# Altium PCB 遥控2.PcbDoc
Units mil, origin at the board's own origin, x right, y up, seen from the top; angles counter-clockwise.
Board outline 1574.8 x 787.4 mil, 2 copper layers (Top Layer, Bottom Layer); 29 components, 15 nets, 79 pads, 5 vias.
Unrouted connection lines stored in the file: 22.
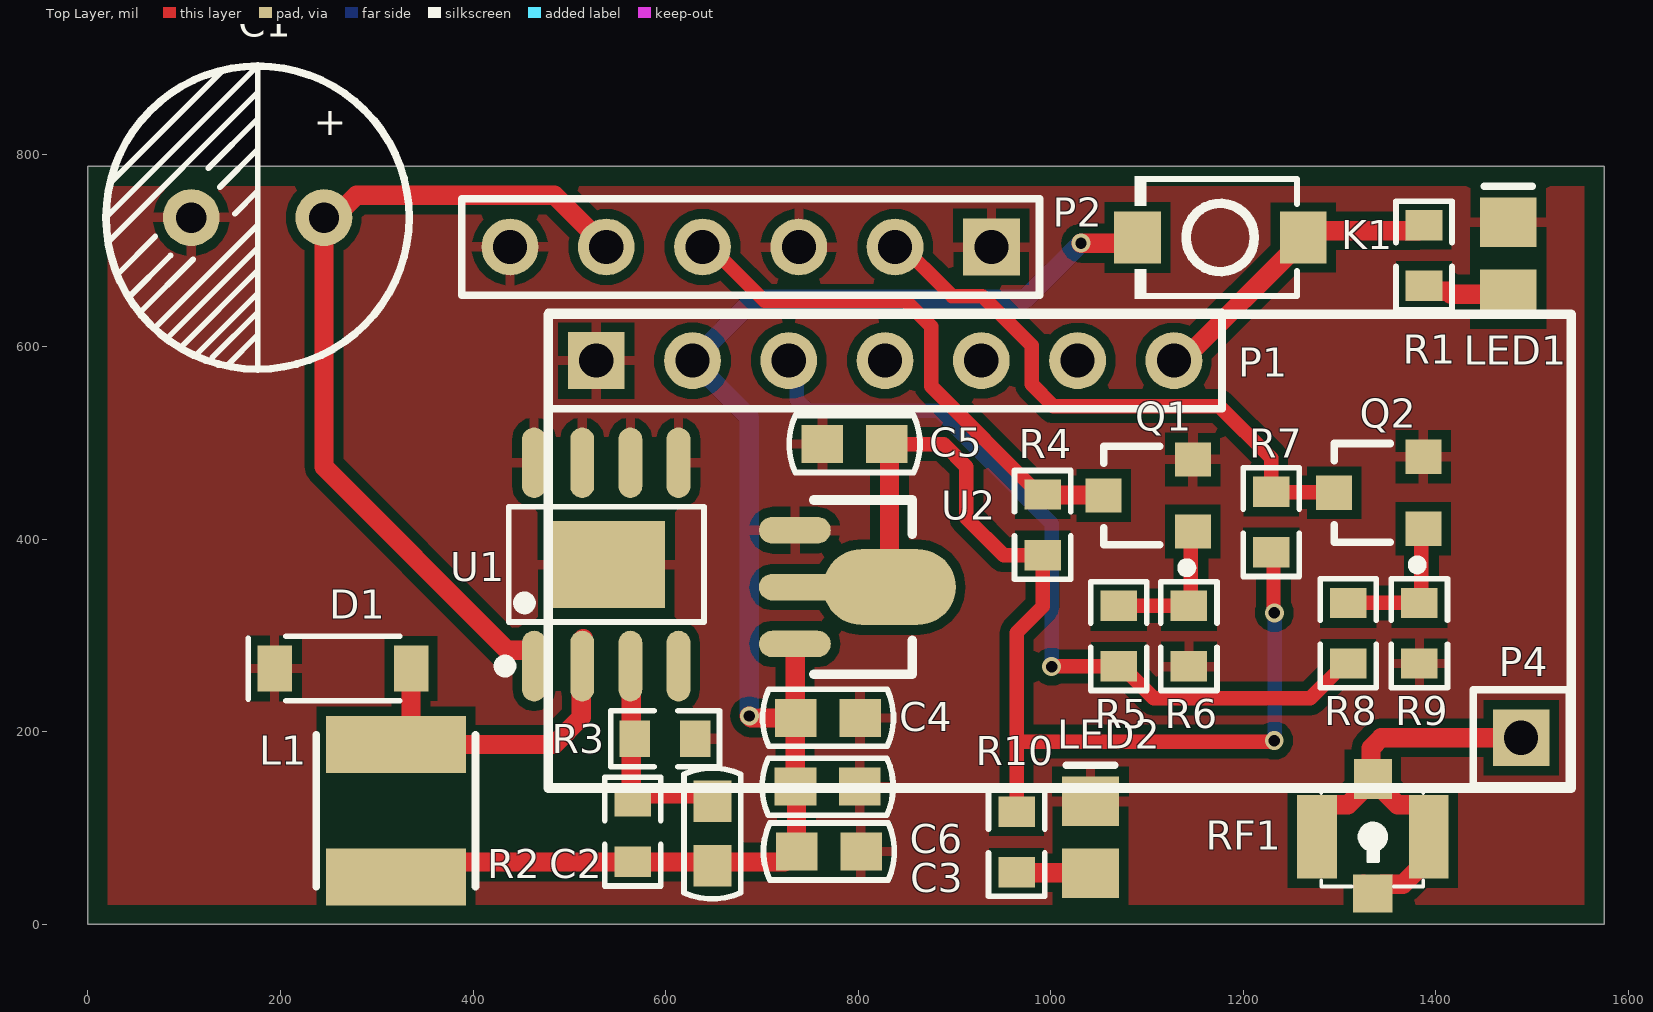
[diagram p0: Top Layer view]
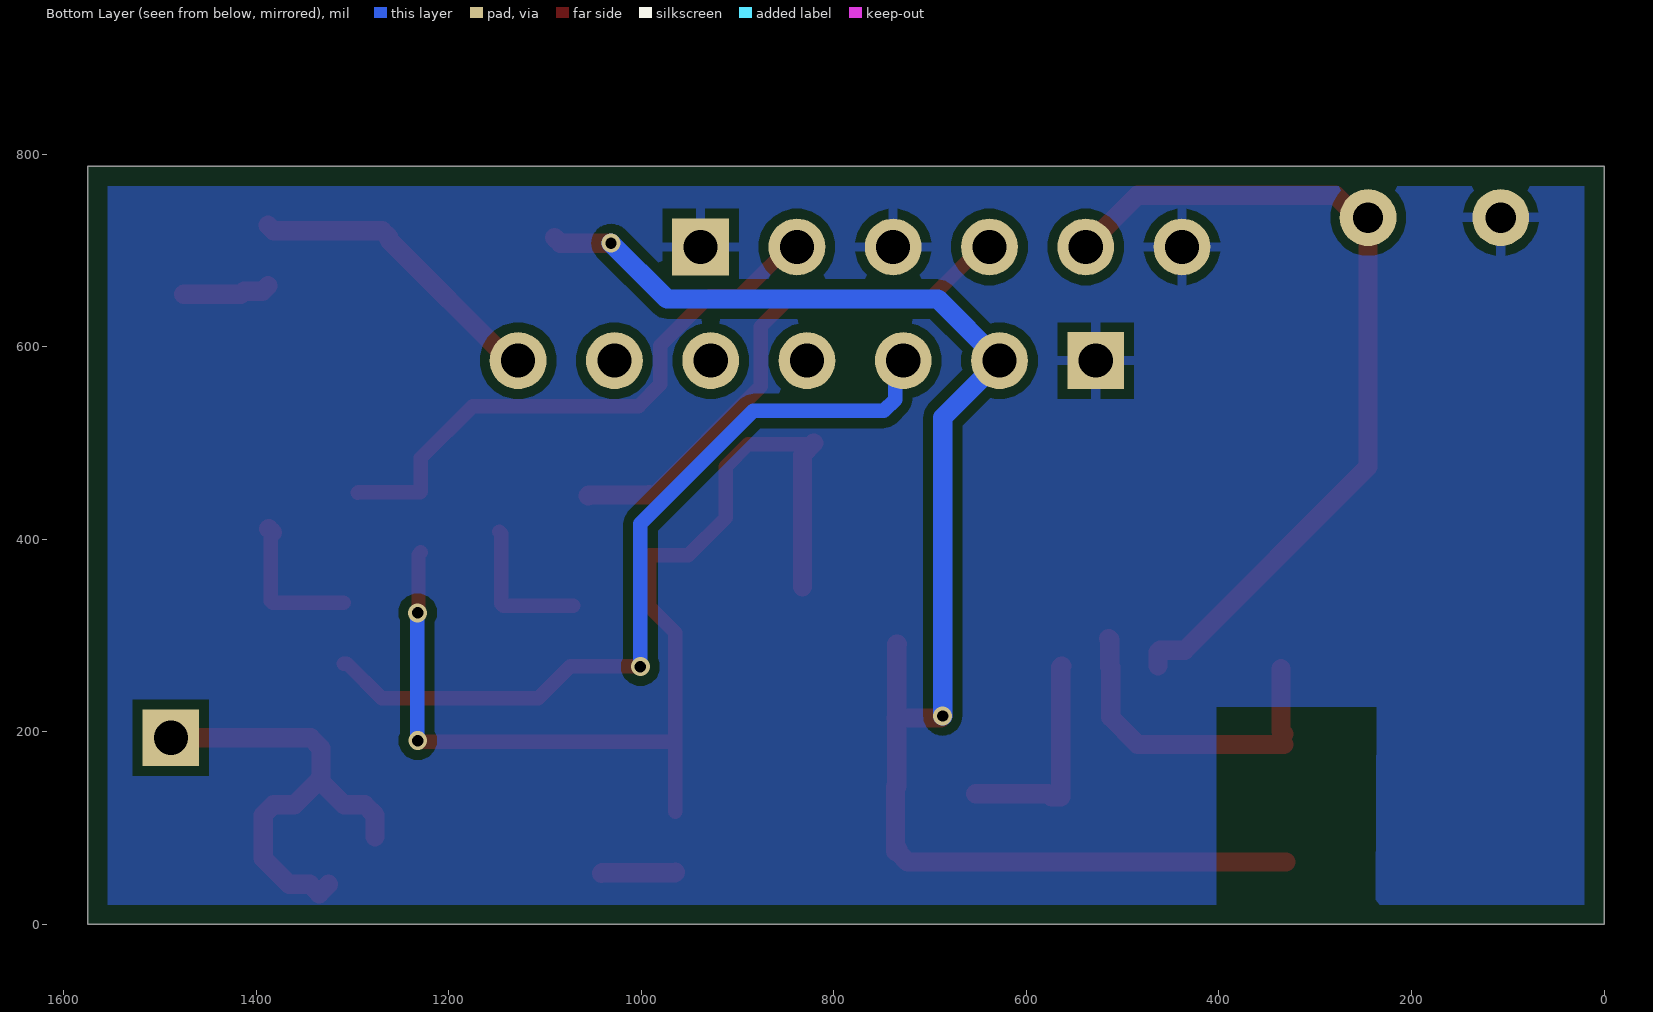
[diagram p1: Bottom Layer view, seen from below]
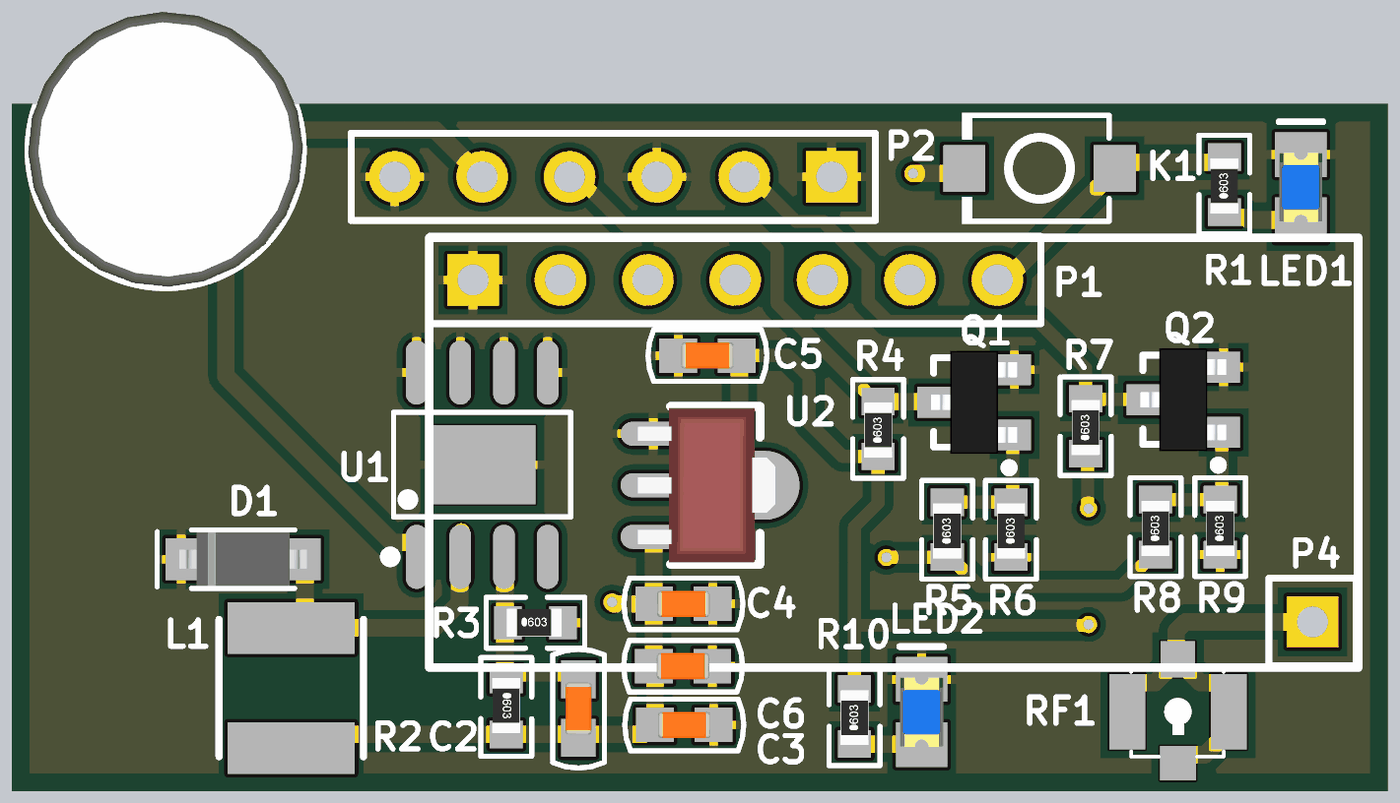
[diagram p2: 3D render of the assembled board from above, using the file's embedded part models]

## Layer stack, top to bottom
Top Solder: solder mask 0.4, Solder Resist, Dk 3.5
Top Layer: signal copper 1.4
Dielectric 1: dielectric 12.6, FR-4, Dk 4.8
Bottom Layer: signal copper 1.4
Bottom Solder: solder mask 0.4, Solder Resist, Dk 3.5

## Board outline
0,0 0,787.4 1574.8,787.4 1574.8,0

## Design rules (kind name [scope] priority, off if disabled: settings)
BoardOutlineClearance [All] p1: gap=20 ignorepadtopadclearanceinfootprint=FALSE
Clearance [All] p1: gap=10 ignorepadtopadclearanceinfootprint=FALSE except(0: Arc-Hole Track-Hole SMDPad-Hole THPad-Hole Via-Hole Fill-Hole Poly-Hole Region-Hole Text-Hole)
PolygonConnect [All] p1: connectstyle=Relief reliefconductorwidth=10 reliefentries=4 polygonreliefangle="90 Angle" airgapwidth=10
RoutingVias [All] p1: holewidth=11.81 width=19.68 viastyle="Through Hole" minholewidth=11.81 minwidth=19.68 maxholewidth=11.81 maxwidth=19.68
SolderMaskExpansion [All] p1: expansion=4 istentingtop=FALSE
Width [All] p1: maxlimit=30 minlimit=10 preferedwidth=20
30 further rules are at their usual default settings.

## Components (designator, comment, footprint, x,y, rotation, side; value= is the part's Value field where it differs from the comment)
C1 "33uF/100V" 25V330UF-ZC 176.18,734.25 r180 top
C2 "33nF" CAP-0603 648.62,94.49 r270 top
C3 "1uF" CAP-0603 769.69,75.79 r180 top
C4 "10uF" CAP-0603 768.7,214.57 r180 top
C5 "10uF" CAP-0603 796.26,499.02 r0 top
C6 "100nF" CAP-0603 768.32,143.08 r180 top
D1 "S210" SOD-123 264.76,265.75 r180 top
K1 "SW-PB" SW-SMD_L3.9-W3.0-P4.45 1176.18,713.58 r180 top
L1 "47uH" IND-SMD_L4.0-W4.0_FNR4012S 319.88,118.11 r90 top
LED1 "LED" LED_0805 1475.39,691.93 r90 top
LED2 "LED" LED_0805 1041.34,90.55 r90 top
P1 "Header 7" HDR1X7 527.95,585.63 r0 top
P2 "Header 6" HDR1X6 938.39,703.74 r180 top
P4 "Plug" HEADER_1 1488.78,193.9 r180 top
Q1 "SS8050" SOT-23 1101.39,445.44 r90 top
Q2 "SS8050" SOT-23 1340.8,448.39 r90 top
R1 "1K" "0603 - duplicate1" 1387.8,694.88 r90 top
R2 "10K" "0603 - duplicate1" 565.94,96.46 r270 top
R3 "3.3K" "0603 - duplicate1" 599.41,192.91 r0 top
R4 "4.7K" "0603 - duplicate1" 991.65,415.04 r90 top value=10K
R5 "1K" "0603 - duplicate1" 1070.65,299.54 r90 top value=10K
R6 "10K" "0603 - duplicate1" 1143.65,299.54 r90 top
R7 "4.7K" "0603 - duplicate1" 1229.06,417.99 r90 top value=10K
R8 "1K" "0603 - duplicate1" 1309.06,302.49 r90 top value=10K
R9 "10K" "0603 - duplicate1" 1383.06,302.49 r90 top
R10 "1K" "0603 - duplicate1" 964.57,85.63 r90 top
RF1 "6GHz" CONN-SMD_GT-RF1125A-01G 1334.65,91.54 r0 top
U1 "XL7005A" SOIC-8_L4.9-W3.9-P1.27-LS6.0-BL-EP3.1-1 538.39,374.02 r0 top
U2 "AMS1117-3.3" SOT89 783.46,350.39 r180 top

## Footprints (in the part's own frame and the unit in brackets; to place one, negate y for a bottom-side part, rotate by r counter-clockwise, add the part's x,y. Pads: shape width x height; smd on the part's side, far side on the other; paste and mask are expansions set on the pad)
25V330UF-ZC [mm] "25V330UF-直插电解电容  D=8mm,内径5mm"
  round 1.5 hole 0.8: 1(-1.75,0) 2(1.75,0)
  silkscreen extent -4,-4 4,4, body extent -4,-4.03 4,3.97, height 11.6
"0603 - duplicate1" [mm] "贴片带丝印"
  rect 0.8x0.965 smd: 1(-0.8,0) 2(0.8,0)
  silkscreen extent -1.43,-0.74 1.44,0.74, body extent -0.84,-0.41 0.76,0.41, height 0.45
CAP-0603 [mm] "贴片电容"
  rect 1.1x1 smd: 1(-0.85,0) 2(0.85,0)
  silkscreen extent -1.73,-0.75 1.73,0.75, body extent -0.76,-0.38 0.76,0.38, height 0.78
CONN-SMD_GT-RF1125A-01G [mm]
  rect 1.05x2.2 smd paste+0 mask+0.05: 1(-1.475,-0.012) 3(1.475,-0.012)
  rect 1x1.05 smd paste+0 mask+0.05: 2(0,1.513)
  rect 1.05x1 smd paste+0 mask+0.05: 4(0,-1.513)
  silkscreen extent -1.36,-1.32 1.33,1.35
HDR1X6 [mm] "Connector; Header; 6 Position"
  rect 1.5x1.5 hole 0.9: 1(0,0)
  round 1.5 hole 0.9: 2(2.54,0) 3(5.08,0) 4(7.62,0) 5(10.16,0) 6(12.7,0)
  silkscreen extent -1.27,-1.27 13.97,1.27
HDR1X7 [mm] "Connector; Header; 7 Position"
  rect 1.5x1.5 hole 0.9: 1(0,0)
  round 1.5 hole 0.9: 2(2.54,0) 3(5.08,0) 4(7.62,0) 5(10.16,0) 6(12.7,0) 7(15.24,0)
  silkscreen extent -1.27,-1.27 16.51,1.27
HEADER_1 [mm] "2.54排针-3x1"
  rect 1.5x1.5 hole 0.9: 1(0,0)
  silkscreen extent -1.27,-1.27 1.27,1.27
IND-SMD_L4.0-W4.0_FNR4012S [mm]
  rect 1.5x3.7 smd: 1(-1.75,0) 2(1.75,0)
  silkscreen extent -2,-2.1 2,2.1
LED_0805 [mm] "贴片二极管"
  rect 1.3x1.5 smd: 1(-0.95,0) 2(0.95,0)
  silkscreen extent 1.91,-0.63 1.91,0.64, body extent -1.01,-0.62 1.01,0.62, height 1.1
SOD-123 [mm]
  rect 0.91x1.22 smd: 1(-1.8,0) 2(1.8,0)
  silkscreen extent -1.5,-0.85 2.5,0.85, body extent -1.85,-0.77 1.85,0.78, height 1.18
SOIC-8_L4.9-W3.9-P1.27-LS6.0-BL-EP3.1-1 [mm]
  oval 0.63x1.865 smd: 1(-1.905,-2.683) 2(-0.635,-2.683) 3(0.635,-2.683) 4(1.905,-2.683) 5(1.905,2.682) 6(0.635,2.682) 7(-0.635,2.682) 8(-1.905,2.682)
  rect 3.1x2.3 smd paste+0 mask+0.05: 9(0,0)
  silkscreen extent -2.82,-2.83 2.58,1.52
SOT89 [mm] "SOT89封装"
  oval 1.9x0.7 smd: 1(1.25,-1.5) 3(1.25,1.5)
  oval 3.5x2 smd: 2(-1.25,0)
  oval 2.1x0.7 smd: 2(1.151,0)
  silkscreen extent -1.85,-2.3 0.75,2.3, body extent -2.3,-2.25 1.7,2.25, height 1.5
SOT-23 [mm]
  rect 0.9x0.95 smd: 1(-0.95,-1.175) 2(0.95,-1.175) 3(0,1.175)
  silkscreen extent -2.03,-1.14 1.3,1.18, body extent -1.5,-1.25 1.5,1.25, height 1.15
SW-SMD_L3.9-W3.0-P4.45 [mm]
  rect 1.23x1.36 smd: 1(-2.185,0) 2(2.185,0)
  silkscreen extent -2.03,-1.62 2.25,1.62

## Part data
C1: library part 470uF, Manufacturer=ValuePro, Manufacturer Part="470uF 35V 10*15Green high frequency", nameAlias=Capacitance, spicePre=C, spiceSymbolName="470uF 35V 10*15Green high frequency", Supplier=LCSC, Supplier Part=C45081
C2 C3 C4 C5 C6: library part Cap, "无极性电容", LatestRevisionDate=17-Jul-2002, LatestRevisionNote="Re-released for DXP Platform.", PackageReference=RAD-0.3, Published=8-Jun-2000, Publisher="Altium Limited"
D1: library part B340A, LCSC Assembly=Yes, Manufacturer=MDD, image=//image.lceda.cn/szlcsc/C64982.jpg, Manufacturer Part=B340A, SMT Type=Extend, spicePre=D, spiceSymbolName=B340A, Supplier=LCSC, Supplier Part=C64982
K1: "微动开关", LatestRevisionDate=17-Jul-2002, LatestRevisionNote="Re-released for DXP Platform.", PackageReference=SPST-2, Published=24-Mar-1999, Publisher="Altium Limited", Suppliter Part=C961737
L1: library part 68uH, Manufacturer=SXN, Manufacturer Part=SMDRI127-680MT, nameAlias=Inductance, spicePre=L, spiceSymbolName=SMDRI127-680MT, Supplier=LCSC, Supplier Part=C9907
LED1 LED2: "发光二极管", LatestRevisionDate=08-Jul-2005, LatestRevisionNote="Mech Layer 1 removed.", PackageReference=LED-0, Published=8-Jun-2000, Publisher="Altium Limited"
P1: "Header, 7-Pin", LatestRevisionDate=17-Jul-2002, LatestRevisionNote="Re-released for DXP Platform.", Publisher="Altium Limited"
P2: "Header, 6-Pin", LatestRevisionDate=17-Jul-2002, LatestRevisionNote="Re-released for DXP Platform.", Publisher="Altium Limited"
P4: "安装孔", LatestRevisionDate=17-Jul-2002, LatestRevisionNote="Re-released for DXP Platform.", Publisher="Altium Limited"
Q1 Q2: "NPN贴片三极管", PackageDocument=Sep-1998, Code_JEDEC=TO-92A, ComponentLink1Description="Manufacturer Link", ComponentLink1URL=http://www.fairchildsemi.com/, ComponentLink2Description=Datasheet, ComponentLink2URL=http://www.fairchildsemi.com/ds/2N%2F2N3904.pdf, DatasheetDocument=1997, LatestRevisionDate=15-Jan-2003, LatestRevisionNote="PCB Footprint 'BCY-W3/D4.7' replaced", PackageReference=TO-92A, Published=8-Jun-2000, Publisher="Altium Limited"
R1 R4 R5 R6 R7 R8 R9 R10: library part Res, "贴片电阻", LatestRevisionDate=17-Jul-2002, LatestRevisionNote="Re-released for DXP Platform.", PackageReference=AXIAL-0.4, Published=8-Jun-2000, Publisher="Altium Limited"
R2: library part 1K, LCSC Assembly=Yes, Manufacturer=UniOhm, Manufacturer Part=0603WAF1001T5E, nameAlias="Resistance (Ohms)", SMT Type=Basic, spicePre=R, spiceSymbolName=0603WAF1001T5E, Supplier=LCSC, Supplier Part=C21190
R3: library part 3K, LCSC Assembly=Yes, Manufacturer=UniOhm, Manufacturer Part=0603WAF3001T5E, nameAlias="Resistance (Ohms)", SMT Type=Basic, spicePre=R, spiceSymbolName=0603WAF3001T5E, Supplier=LCSC, Supplier Part=C4211
RF1: library part GT-RF1125A-01G, JLCPCB Part Class="Extended Part", LCSC Part Name="内针 IPEX 立贴", Manufacturer=G-Switch(品赞), Operating Temperature Range=-40℃~+90℃, Add into BOM=yes, Connector Type=板端, Convert to PCB=yes, Datasheet=https://atta.szlcsc.com/upload/public/pdf/source/20240806/E29158DC2BBCFBE0FBB4FF318E1913A6.pdf, Device=GT-RF1125A-01G, Impedance=20mΩ, Interface=内针, Interface Diameter=2mm, Interface Length/Height=1.25mm, Manufacturer Part=GT-RF1125A-01G, Number of Ports=1, RF Series=IPEX, Style=立贴, Supplier=LCSC, Supplier Footprint=SMD, Supplier Part=C5299419, Symbol=GT-RF1125A-01G
U1: Frequency - Switching=150kHz, JLCPCB Part Class="Extended Part", LCSC Part Name="0.4A 150kHz 80V 降压型DC-DC转换器", Manufacturer=XLSEMI(芯龙), Operating Temperature=-40℃~+125℃@(TJ), Output Current=400mA, Output Voltage=1.25V~20V, Quiescent Current=2.5mA, Voltage - Supply=5V~80V, Add into BOM=yes, Convert to PCB=yes, Datasheet=https://atta.szlcsc.com/upload/public/pdf/source/20150821/1457707346919.pdf, Device=XL7005A, Function=降压型, Manufacturer Part=XL7005A, Number of Outputs=1, Output Type=可调, Supplier=LCSC, Supplier Footprint=SOIC-8-EP, Supplier Part=C50848, Switch tube (built-in/external)=内置, Symbol=XL7005A, Synchronous Rectifier=否, Topology=降压式
U2: library part AMS1117, "3.3V稳压芯片"

## Via types
v1: diameter 19.68, hole 11.81, Top Layer to Bottom Layer, 5 vias

## Nets (pads, with @x,y where several pads share a name; then routed paths per layer and width w, separated by ;. In a path a pad name is that pad's centre, name@x,y a point inside that pad or via, vN(x,y) a via of type N, cw(c..) or ccw(c..) an arc to the next point about the centre after c; other vN are vias at no path point)
+3.3V: C5.2 R4.1 R7.1 R10.2 U2.2 | length 1139
  Top Layer w15: C5.2 888.78,499.02 912.4,475.39 912.4,422.24 951.1,383.54 R4.1 991.65,330.24 964.57,303.15 964.57,191.93 ; R10.2 964.57,191.93 ; R7.1 1231.48,384.08 1231.48,324.63 v1(1232.37,323.73) v1@1233.27,322.83 ; v1(1232.28,190.94) 1231.3,189.96 966.54,189.96 964.57,191.93
  Top Layer w20: C5.2@820.87,500 832.66,488.2 U2.2@832.66,350.4
  Bottom Layer w15: v1(1232.28,190.94) 1232.78,191.44 v1@1232.78,322.34
+5V: C2.2 C3.2 C4.2 C6.2 K1.2 L1.1 P1.2 R2.2 U2.3 | length 1583.7
  Top Layer w20: L1.1@330.71,64.96 R2.2 723.43,64.96 733.76,75.3 C3.2@733.76,78.25 ; v1(687.01,216.54) 688.98,214.57 C4.2@734.56,214.57 ; U2.3 734.56,291.05 C4.2@734.56,214.57 ; C6.2 734.56,143.38 C4.2@734.56,214.57 ; C4.2 C4.2@734.56,214.57 ; C3.2@736,76 C6.2@736,143.08 ; v1(1031.5,707.68) 1084.26,707.68 K1.2
  Bottom Layer w20: v1(687.01,216.54) 687.01,526.57 P1.2 691.93,649.61 973.43,649.61 v1(1031.5,707.68)
A1: P2.4 Q1.3 R4.2 | length 564.4
  Top Layer w15: P2.4@637.8,712.6 702.76,647.64 849.48,647.64 875.98,621.13 875.98,558.96 988.41,446.54 R4.2
  Top Layer w20: R4.2 992.2,445.99 1054.59,445.99 Q1.3
A2: P2.2 Q2.3 R7.2 | length 610.4
  Top Layer w15: P2.2@837.8,712.6 897.62,652.77 928.92,652.77 980.32,601.38 980.32,560.95 1002.88,538.39 1175.2,538.39 1229.06,484.52 R7.2 1229.61,448.94 1294,448.94 Q2.3
ANT: P4.1 RF1.1 RF1.2 RF1.3 RF1.4 | length 495.4
  Top Layer w20: RF1.1 1276.58,113.68 1287.25,124.35 1308.9,124.35 RF1.2@1334.65,150.1 ; RF1.4@1324.97,41.67 RF1.4 1344.34,41.67 1365.98,41.67 1392.72,68.41 RF1.3 1392.72,113.68 1382.05,124.35 1360.39,124.35 RF1.2@1334.65,150.1 ; P4.1 1343.5,193.9 1332.68,183.07 1332.68,153.05 RF1.2 RF1.2@1334.65,150.1
D0_5V: P1.3 R5.1 R8.1 | length 847.4
  Top Layer w15: v1@1000.98,268.04 R5.1 1073.9,268.04 1107.15,234.79 1269.61,234.79 1305.82,270.99 R8.1
  Bottom Layer w15: P1.3 736.38,577.2 736.38,545.11 748.03,533.46 883.86,533.46 1000.98,416.34 v1(1000.98,267.72)
GND: C1.2 C3.1 C4.1 C5.1 C6.1 D1.2 LED1.2 LED2.2 P1.1 P2.1 P2.3 P2.6 Q1.2 Q2.2 R3.2 R6.1 R9.1 U1.5 U1.6 U1.7 U1.8 U1.9 U2.1
NetC2_1: C2.1 R2.1 R3.1 U1.3 | length 226.1
  Top Layer w20: U1.3 564.3,267.49 564.3,192.91 564.3,132.38 573.62,132.38 577.07,135.83 C2.1@652.56,135.83
NetD1_1: D1.1 L1.2 U1.2 | length 346.1
  Top Layer w20: L1.2@332.68,187.01 484.25,187.01 512.47,215.22 512.47,267.49 U1.2 ; L1.2@334.15,196.36 332.68,197.83 335.63,200.79 D1.1 ; U1.2@513.45,267.49 513.45,296.03 U1.2@514.37,296.95
NetLED1_1: LED1.1 R1.1 | length 91.3
  Top Layer w20: R1.1 1393.54,657.64 1412.76,657.64 1415.87,654.53 LED1.1
NetLED2_1: LED2.1 R10.1 | length 77.2
  Top Layer w20: R10.1 965.06,53.64 1040.85,53.64 LED2.1
NetQ1_1: Q1.1 R5.2 R6.2 | length 151.7
  Top Layer w15: R5.2 R6.2 1145.65,333.03 1145.65,406.04 Q1.1
NetQ2_1: Q2.1 R8.2 R9.2 | length 154.2
  Top Layer w15: R8.2 R9.2 1385.06,335.98 1385.06,405.25 Q2.1@1383.19,407.12
  Top Layer w20: Q2.1@1383.19,407.12 Q2.1
V+: C1.1 P2.5 U1.1 | length 896.4
  Top Layer w20: U1.1 463.39,282.67 461.17,284.88 435.59,284.88 245.08,475.39 C1.1 255.65,734.25 278.8,757.4 484.72,757.4 P2.5
VT: K1.1 P1.7 R1.2 | length 319.6
  Top Layer w20: P1.7 1136.81,585.63 1262.2,711.02 K1.1 1269.25,720.63 1382.05,720.63 R1.2
pads on no net: P1.4 P1.5 P1.6 U1.4

## Polygon pours and split planes (outlines as drawn)
GND on Bottom Layer "GND_L02_P001" (solid, remove dead copper, pour order 1): 0,787.4 0,0 1574.8,0 1574.8,695.87 1574.8,787.4
GND on Top Layer "GND_L01_P000" (solid, remove dead copper, pour order 0): 0,790.12 0,0 1574.8,0 1574.8,787.4

## Other copper
Top Layer:
  pour cut-out: 237.05,226.54 237.05,20.39 402.72,20.39 402.72,226.54
Bottom Layer:
  pour cut-out: 236.22,226.38 402.56,226.38 402.56,19.68 239.17,19.68 237.2,21.65

## Silkscreen, mask and mechanical layers (free items; w line width, h text height)
Top Overlay:
  lines w10: 477.95,141.73 1540.94,141.73 1540.94,633.86 477.95,633.86 477.95,141.73
Mechanical 1:
  the board outline again, w20

## Text inside footprints (layer, text, board x,y; h text height)
C1: Top Overlay "+" at 268.7,844.49 h30 r180